# EAGLE board Range Finder Schematic v24 (EAGLE 9.7.0)
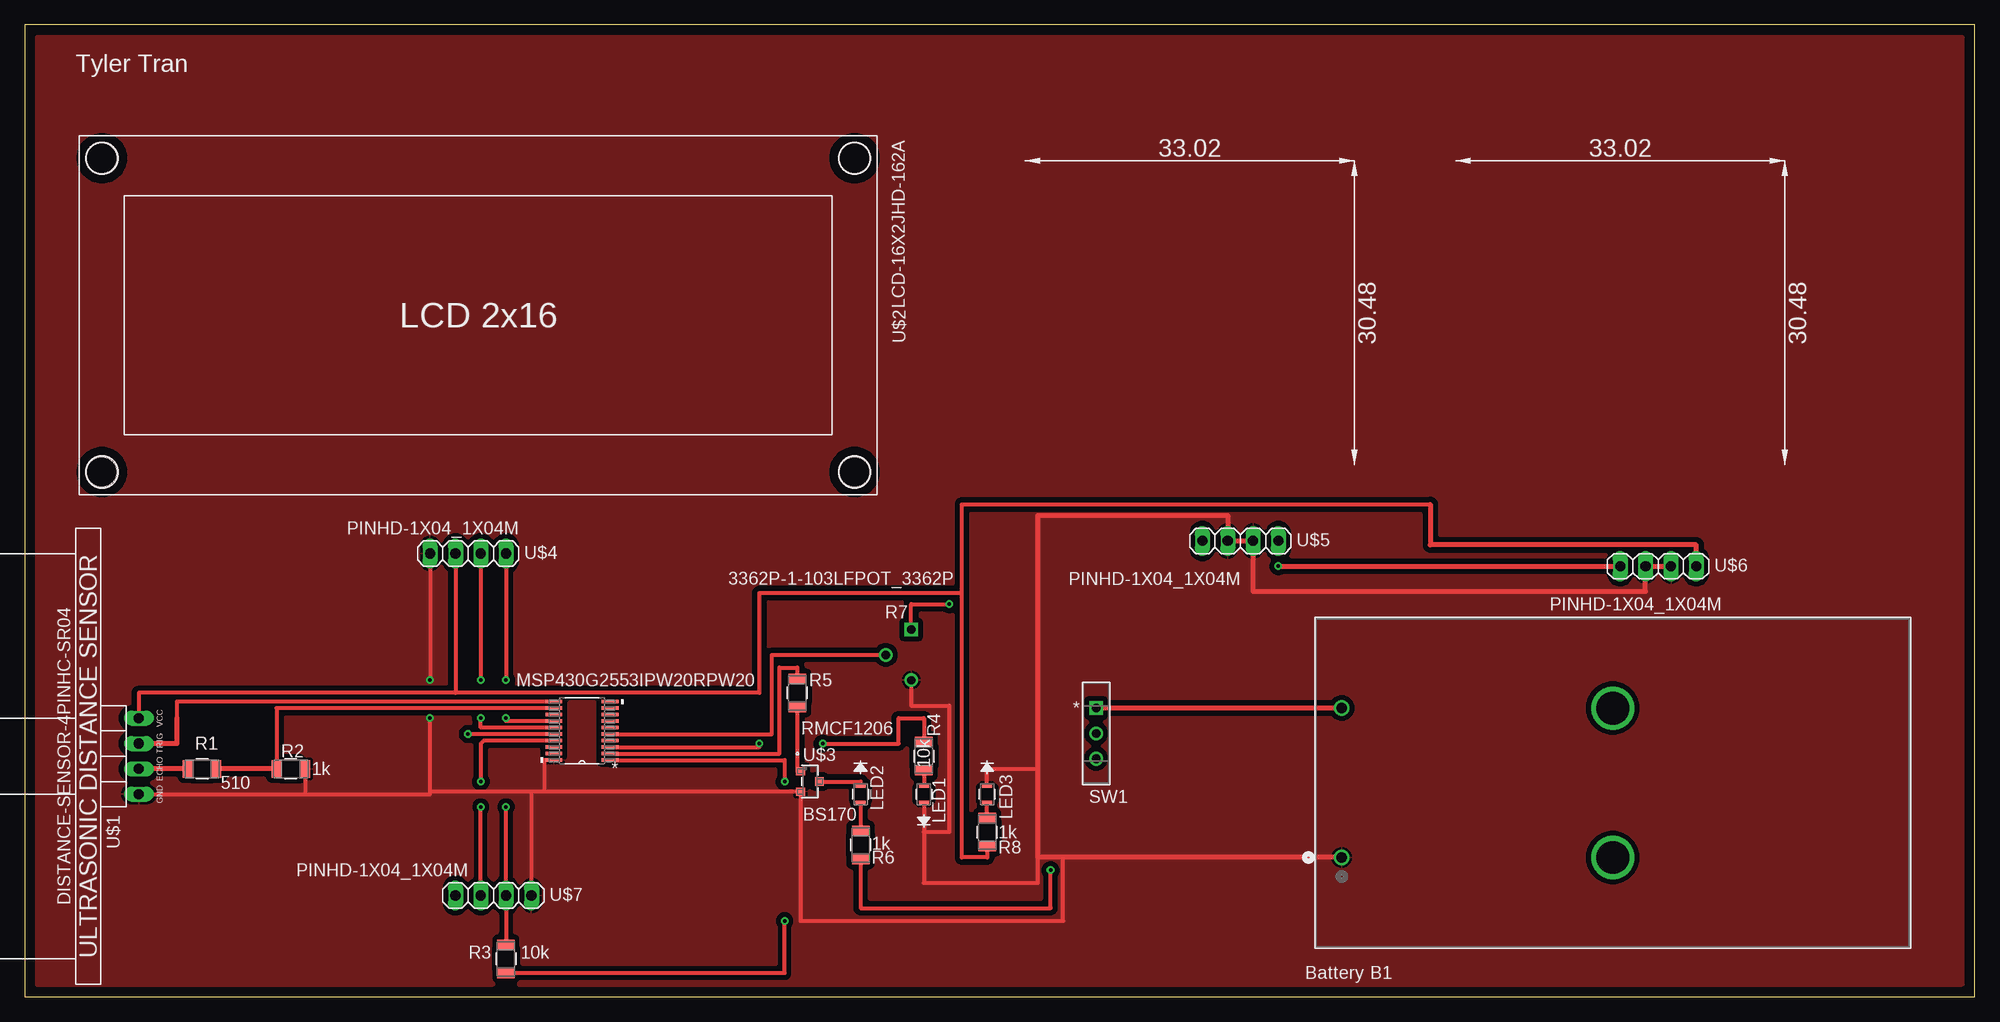
[diagram p0: board, top side]
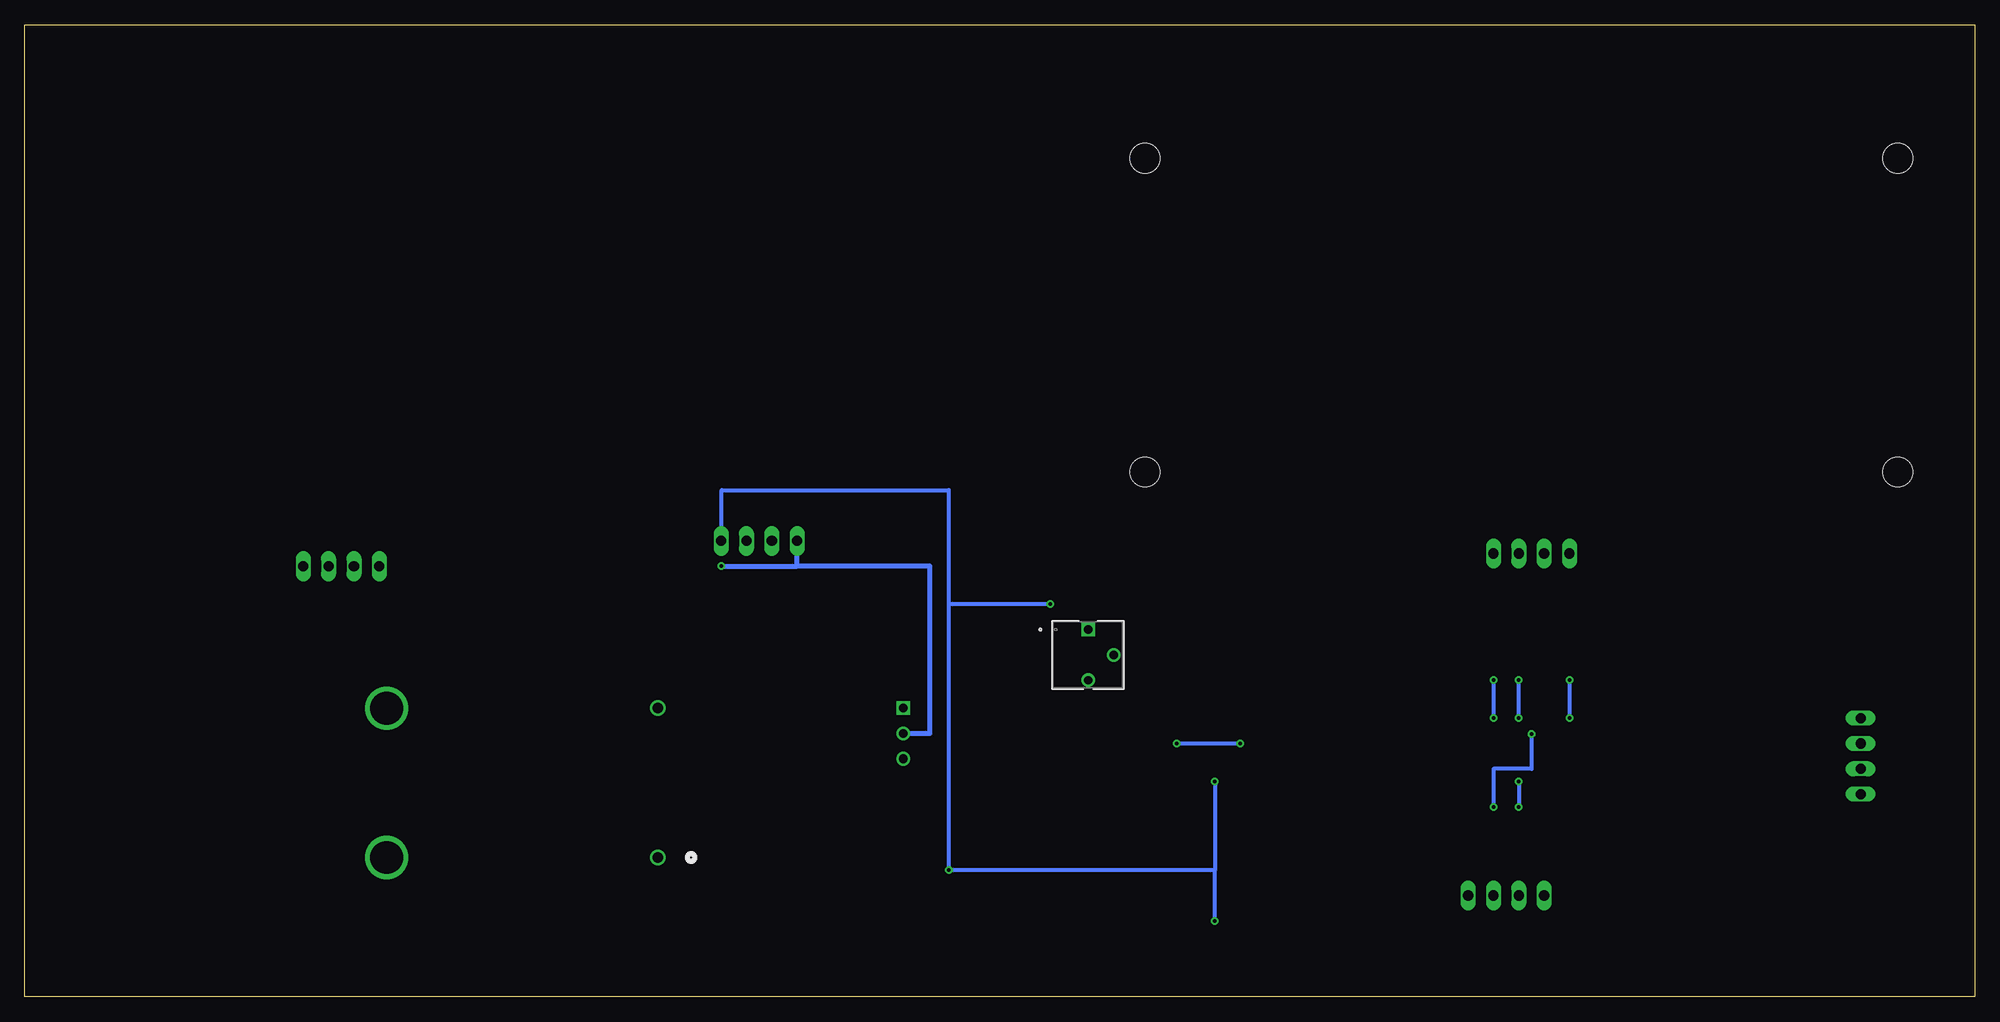
[diagram p1: board, bottom side, seen from below]

Size 195.56 x 97.46 mm. Coordinates in mm from the lower left corner, seen from the top.
Outline: 0,0 195.56,0 195.56,97.46 0,97.46 0,0
Copper layers (1*16): Top / Bottom
Stack-up Default Layer Stack: Top SilkScreen Epoxy Ink / Top SolderMask SR:Green 0.0254mm Dk 4.3 / Top Surface Finish Lead-Free 0.02mm / Top CuFoil:007 0.035mm / Dielectric-1 User Defined 1.5mm / Bottom CuFoil:007 0.035mm / Bottom Surface Finish Lead-Free 0.02mm / Bottom SolderMask SR:Green 0.0254mm Dk 4.3 / Bottom SilkScreen Epoxy Ink
Design rules: minimum copper width 6mil, minimum drill size 0.35mm, copper clearance wire_polygon to wire_polygon 6mil, copper clearance wire_polygon to pad_smd 6mil, copper clearance wire_polygon to via 6mil, copper clearance pad_smd to pad_smd 6mil, copper clearance pad_smd to via 6mil, copper clearance via to via 6mil, copper clearance smd to pad (same net) 6mil, copper clearance smd to via (same net) 6mil, copper clearance smd to smd (same net) 6mil, dimension clearance 40mil, via restrict clearance 0mil, restrict clearance 0mil, drill distance 6mil, keepout clearance 0mil

## Footprints (pad centres in the part's own frame; a part is rotated, then mirrored left to right if it is on the bottom)
2462_KEY = drill 1.016 pad 1.524: 1 0,0; 2 0,-14.986 | drill 3.302 pad 3.302: 3 -27.178,0; 4 -27.178,-14.986
LED_BS75000_WRE = smd 0.406 x 0.991: 1 -0.851,0; 2 0.851,0
STA_RMCF1206_STP = smd 1.016 x 1.753: 1 -1.422,0; 2 1.422,0
POT_3362P = drill 0.838 pad 1.346 square: 1 0,0 | drill 0.838 pad 1.346: 2 2.54,2.54; 3 5.08,0
09.03201_EAO = drill 0.864 pad 1.372 square: 1 0,0 | drill 0.864 pad 1.372: 2 0,-2.54; 3 0,-5.08
PW20 = smd 1.676 x 0.356: 1 -2.819,2.925; 2 -2.819,2.275; 3 -2.819,1.625; 4 -2.819,0.975; 5 -2.819,0.325; 6 -2.819,-0.325; 7 -2.819,-0.975; 8 -2.819,-1.625; 9 -2.819,-2.275; 10 -2.819,-2.925; 11 2.819,-2.925; 12 2.819,-2.275; 13 2.819,-1.625; 14 2.819,-0.975; 15 2.819,-0.325; 16 2.819,0.325; 17 2.819,0.975; 18 2.819,1.625; 19 2.819,2.275; 20 2.819,2.925
HC-SR04 = drill 1.016 long: 1 -3.81,0; 2 -1.27,0; 3 1.27,0; 4 3.81,0
JHD-162A = hole 3: -25.298,0.279; 50.19,0.279; -25.298,-31.191; 50.19,-31.191
SOT-23_DIO = smd 0.813 x 0.889: 1 -1.025,-0.945; 2 1.025,-0.945; 3 0,0.945
1X04 = drill 1.016 long: 1 -3.81,0; 2 -1.27,0; 3 1.27,0; 4 3.81,0

## Placement (x,y rotation side)
B1  Battery  [2462_KEY]  132.08,13.97 180 top
LED1  [LED_BS75000_WRE]  90.17,20.32 90 top
LED2  [LED_BS75000_WRE]  83.82,20.32 270 top
LED3  [LED_BS75000_WRE]  96.52,20.32 270 top
R1  510  [STA_RMCF1206_STP]  17.78,22.86 0 top
R2  1k  [STA_RMCF1206_STP]  26.67,22.86 0 top
R3  10k  [STA_RMCF1206_STP]  48.26,3.81 270 top
R4  10k  [STA_RMCF1206_STP]  90.17,24.13 270 top
R5  RMCF1206  [STA_RMCF1206_STP]  77.47,30.48 270 top
R6  1k  [STA_RMCF1206_STP]  83.82,15.24 90 top
R7  3362P-1-103LFPOT_3362P  [POT_3362P]  88.9,36.83 270 bottom
R8  1k  [STA_RMCF1206_STP]  96.52,16.51 90 top
SW1  [09.03201_EAO]  107.44,28.96 0 top
U1  MSP430G2553IPW20RPW20  [PW20]  55.88,26.67 180 top
U$1  DISTANCE-SENSOR-4PINHC-SR04  [HC-SR04]  11.43,24.13 270 top
U$2  LCD-16X2JHD-162A  [JHD-162A]  33.02,83.82 0 top
U$3  BS170  [SOT-23_DIO]  78.74,21.59 270 top
U$4  PINHD-1X04_1X04M  [1X04]  44.45,44.45 180 top
U$5  PINHD-1X04_1X04M  [1X04]  121.92,45.72 180 top
U$6  PINHD-1X04_1X04M  [1X04]  163.83,43.18 180 top
U$7  PINHD-1X04_1X04M  [1X04]  46.99,10.16 180 top

## Library data of the parts
B1 = Range_Finder_lib; COPYRIGHT: Copyright (C) 2025 Ultra Librarian. All rights reserved.; MANUFACTURER_PART_NUMBER: 2462; MFR_NAME: Keystone Electronics
LED1-LED3 = Range_Finder_lib; COPYRIGHT: Copyright (C) 2024 Ultra Librarian. All rights reserved.; MANUFACTURER_PART_NUMBER: 150080BS75000; MFR_NAME: Wurth Electronics
R1-R6 R8 = Range_Finder_lib; COPYRIGHT: Copyright (C) 2025 Ultra Librarian. All rights reserved.; MANUFACTURER_PART_NUMBER: RMCF1206JT510R; MFR_NAME: Stackpole International
R7 = Range_Finder_lib; COPYRIGHT: Copyright (C) 2025 Ultra Librarian. All rights reserved.; MANUFACTURER_PART_NUMBER: 3362P-1-103LF; MFR_NAME: Bourns Electronics
SW1 = Range_Finder_lib; COPYRIGHT: Copyright (C) 2025 Ultra Librarian. All rights reserved.; MANUFACTURER_PART_NUMBER: 09.03201.02; MFR_NAME: EAO; TYPE: Slide Switches
U1 = Range_Finder_lib; COPYRIGHT: Copyright (C) 2025 Ultra Librarian. All rights reserved.; MANUFACTURER_PART_NUMBER: MSP430G2553IPW20R; MFR_NAME: Texas Instruments
U$1 = Tinkercad
U$2 = LCD_DISP-6
U$3 = Range_Finder_lib
U$4-U$7 = Library_Reg

## Nets
3.3V: R3.2 R6.1 R7.1 U1.1 U$5.1
5V: R8.1 U$1.1 U$4.3 U$6.1
GND: B1.1 LED1.1 LED3.1 R2.2 R7.3 U1.20 U$1.4 U$3.2 U$4.4 U$5.2 U$5.3 U$6.2 U$6.3 U$7.1
N$1: R1.2 R2.1 U1.12
N$2: R1.1 U$1.3
N$3: U1.11 U$1.2
N$4: U1.14 U$4.1
N$5: U1.15 U$4.2
N$6: R4.1 U1.3
N$7: LED1.2 R4.2
N$8: R5.1 U1.2
N$9: R5.2 U$3.1
N$10: LED2.2 R6.2
N$11: LED2.1 U$3.3
N$12: R7.2 U1.5
N$13: B1.2 SW1.1
N$14: LED3.2 R8.2
N$15: SW1.2 U$5.4 U$6.4
N/C: U$7.4
RST: R3.1 U1.16 U$7.2
TEST: U1.17 U$7.3

## Tracks (layer width: path | path; a pad name or v marks a point on that pad's centre or on a via)
3.3V  (via drill 0.35)
  Top 0.406: R6.1 83.82,8.89 102.87,8.89 v102.87,12.7 | U1.1 76.2,23.75 v76.2,21.59 | R7.1 88.9,39.37 v92.71,39.37 | R3.2 76.2,2.39 v76.2,7.62
  Bottom 0.406: U$5.1 125.68,45.77 125.68,50.8 102.87,50.8 102.87,39.37 | 102.87,39.37 v102.87,12.7 76.2,12.7 | v76.2,21.59 76.2,12.7 | v92.71,39.37 102.87,39.37 | v76.2,7.62 76.2,12.7
5V
  Top 0.406: 140.97,49.38 93.98,49.38 93.98,40.49 | R8.1 96.52,13.97 93.98,13.97 93.98,40.49 | 93.98,40.49 73.66,40.49 73.66,30.48 43.18,30.48 | 43.18,30.48 11.43,30.48 U$1.1 | U$4.3 43.18,30.48
  Top 0.508: U$6.1 167.64,45.31 140.97,45.31 140.97,49.38
GND  (via drill 0.35)
  Top 0.406: LED3.1 96.52,22.86 101.6,22.86 | LED1.1 90.17,16.51 | 90.17,16.51 90.17,11.43 101.6,11.43 101.6,13.97 | 104.14,13.97 104.14,7.62 77.8,7.62 U$3.2 52.07,20.57 | 52.07,20.57 50.8,20.57 | 50.8,20.57 40.64,20.57 | U1.20 52.07,23.75 52.07,20.57 | R7.3 88.9,29.21 92.71,29.21 92.71,16.51 90.17,16.51 | U$7.1 50.8,20.57 | U$4.4 v40.64,31.75 | 40.64,20.57 v40.64,27.94 | U$1.4 28.09,20.32 | R2.2 28.09,20.32 | 28.09,20.32 40.64,20.32 40.64,20.57
  Top 0.508: U$6.2 U$6.3 162.56,40.64 123.19,40.64 U$5.2 U$5.3 120.65,48.26 101.6,48.26 101.6,22.86 101.6,13.97 104.14,13.97 B1.1
  Bottom 0.406: v40.64,31.75 v40.64,27.94
  pour Top (isolate 0.508): 0,97.79 195.58,97.79 195.58,0 0,0
N$1
  Top 0.406: U1.12 25.25,28.95 R2.1
  Top 0.508: R2.1 R1.2
N$2
  Top 0.508: R1.1 U$1.3
N$3
  Top 0.406: U1.11 15.24,29.59 15.24,27.94
  Top 0.508: 15.24,27.94 15.24,25.4 U$1.2
N$4  (via drill 0.35)
  Top 0.406: U1.14 48.26,27.64 v48.26,27.94 | U$4.1 v48.26,31.75
  Bottom 0.406: v48.26,31.75 v48.26,27.94
N$5  (via drill 0.35)
  Top 0.406: U1.15 45.72,27 v45.72,27.94 | U$4.2 v45.72,31.75
  Bottom 0.406: v45.72,27.94 v45.72,31.75
N$6  (via drill 0.35)
  Top 0.406: U1.3 73.66,25.05 v73.66,25.4 | v80.01,25.4 87.63,25.4 87.63,27.94 90.17,27.94 R4.1
  Bottom 0.406: v73.66,25.4 v80.01,25.4
N$7
  Top 0.406: R4.2 LED1.2
N$8
  Top 0.406: R5.1 77.47,33.02 75.69,33.02 75.69,24.39 U1.2
N$9
  Top 0.406: R5.2 77.47,22.61 U$3.1
N$10
  Top 0.406: LED2.2 R6.2
N$11
  Top 0.406: U$3.3 83.82,21.59 LED2.1
N$12
  Top 0.406: U1.5 74.93,26.34 74.93,34.29 R7.2
N$13
  Top 0.508: B1.2 SW1.1
N$14
  Top 0.406: R8.2 LED3.2
N$15  (via drill 0.35)
  Top 0.508: v125.73,43.18 U$6.4
  Bottom 0.508: 118.11,43.18 104.78,43.18 104.78,26.42 SW1.2 | 118.11,43.18 U$5.4 | v125.73,43.18 118.11,43.18
RST  (via drill 0.35)
  Top 0.406: R3.1 U$7.2 v48.26,19.05 | U1.16 v44.45,26.34
  Bottom 0.406: v48.26,19.05 48.26,22.86 44.45,22.86 v44.45,26.34
TEST  (via drill 0.35)
  Top 0.406: v45.72,21.59 45.72,25.4 46.02,25.7 U1.17 | U$7.3 v45.72,19.05
  Bottom 0.406: v45.72,21.59 v45.72,19.05

## Text on the board
SilkscreenTop: Tyler Tran